# Allegro board PCAD - VIBRATION SENSOR.brd
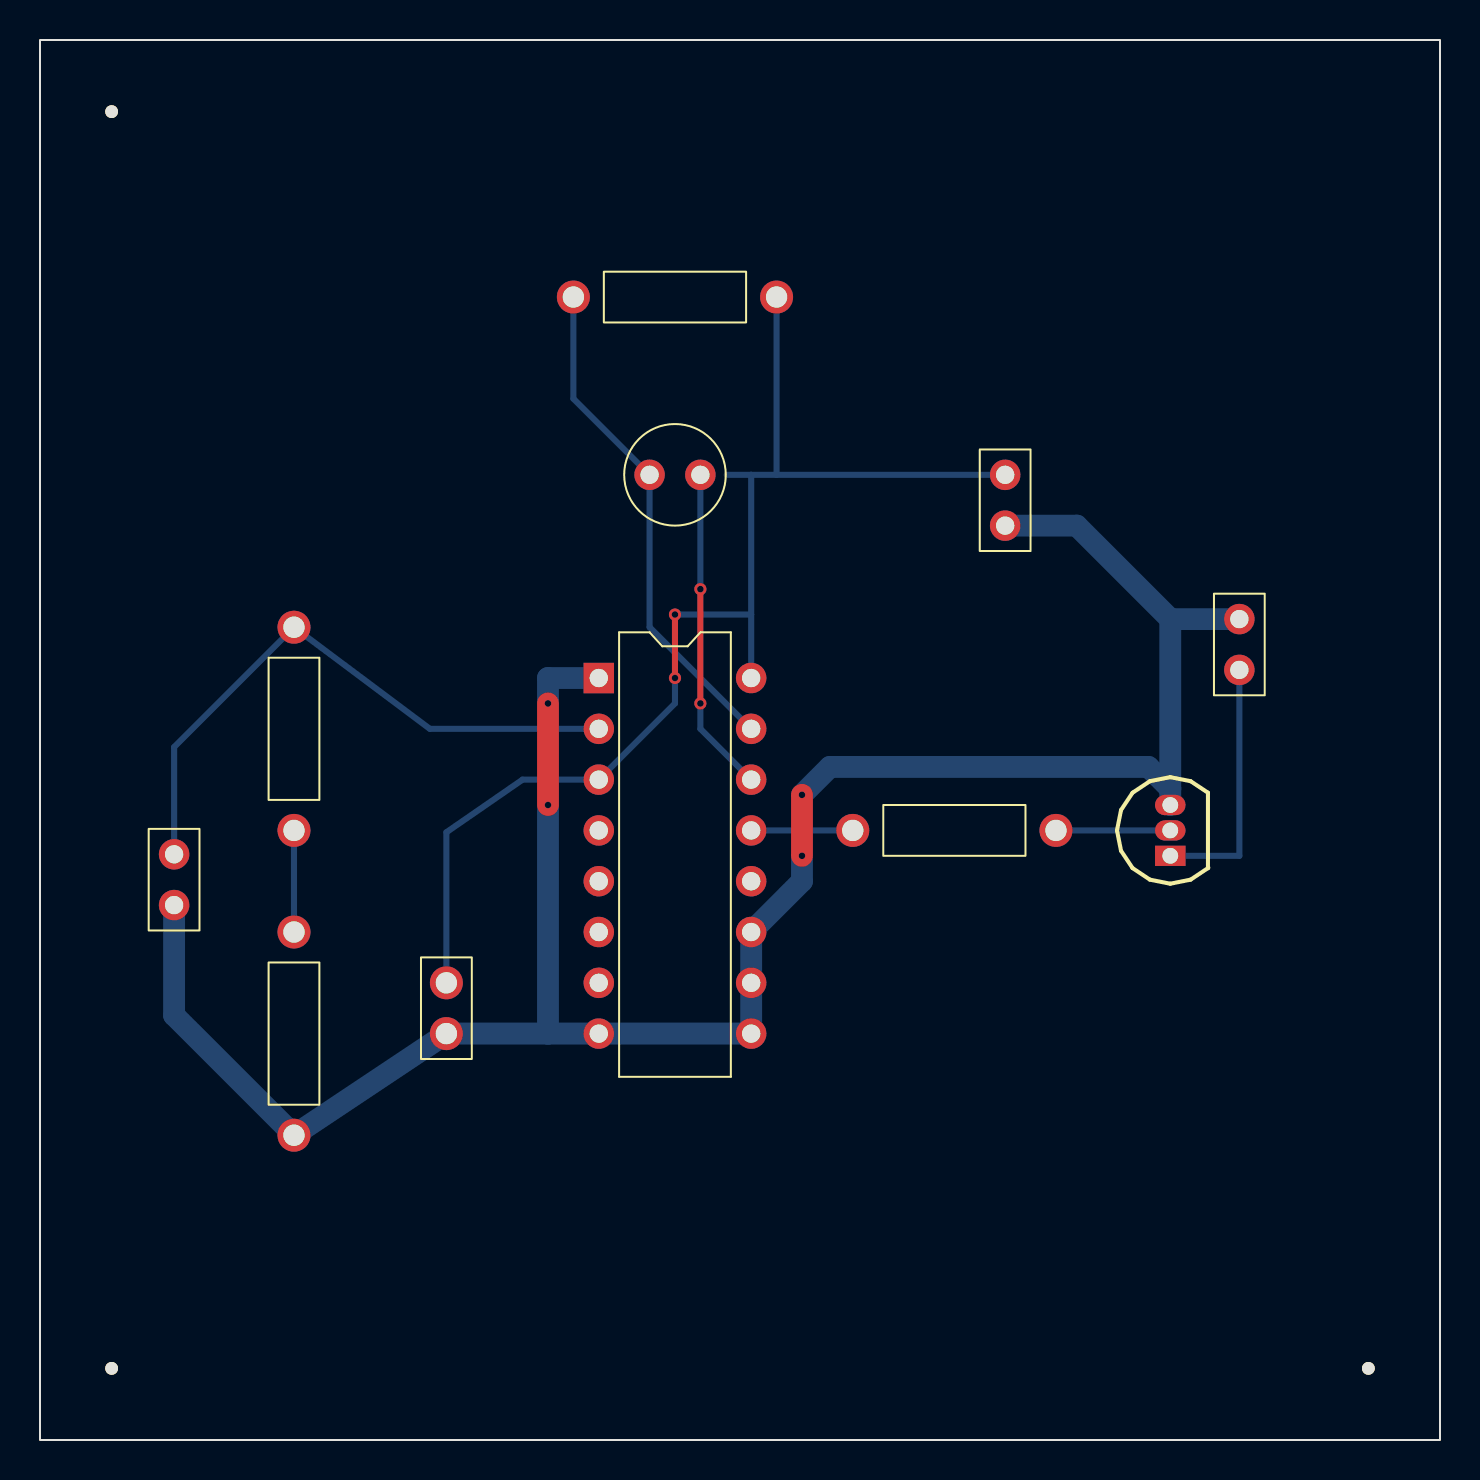
[diagram p0: board, top side]
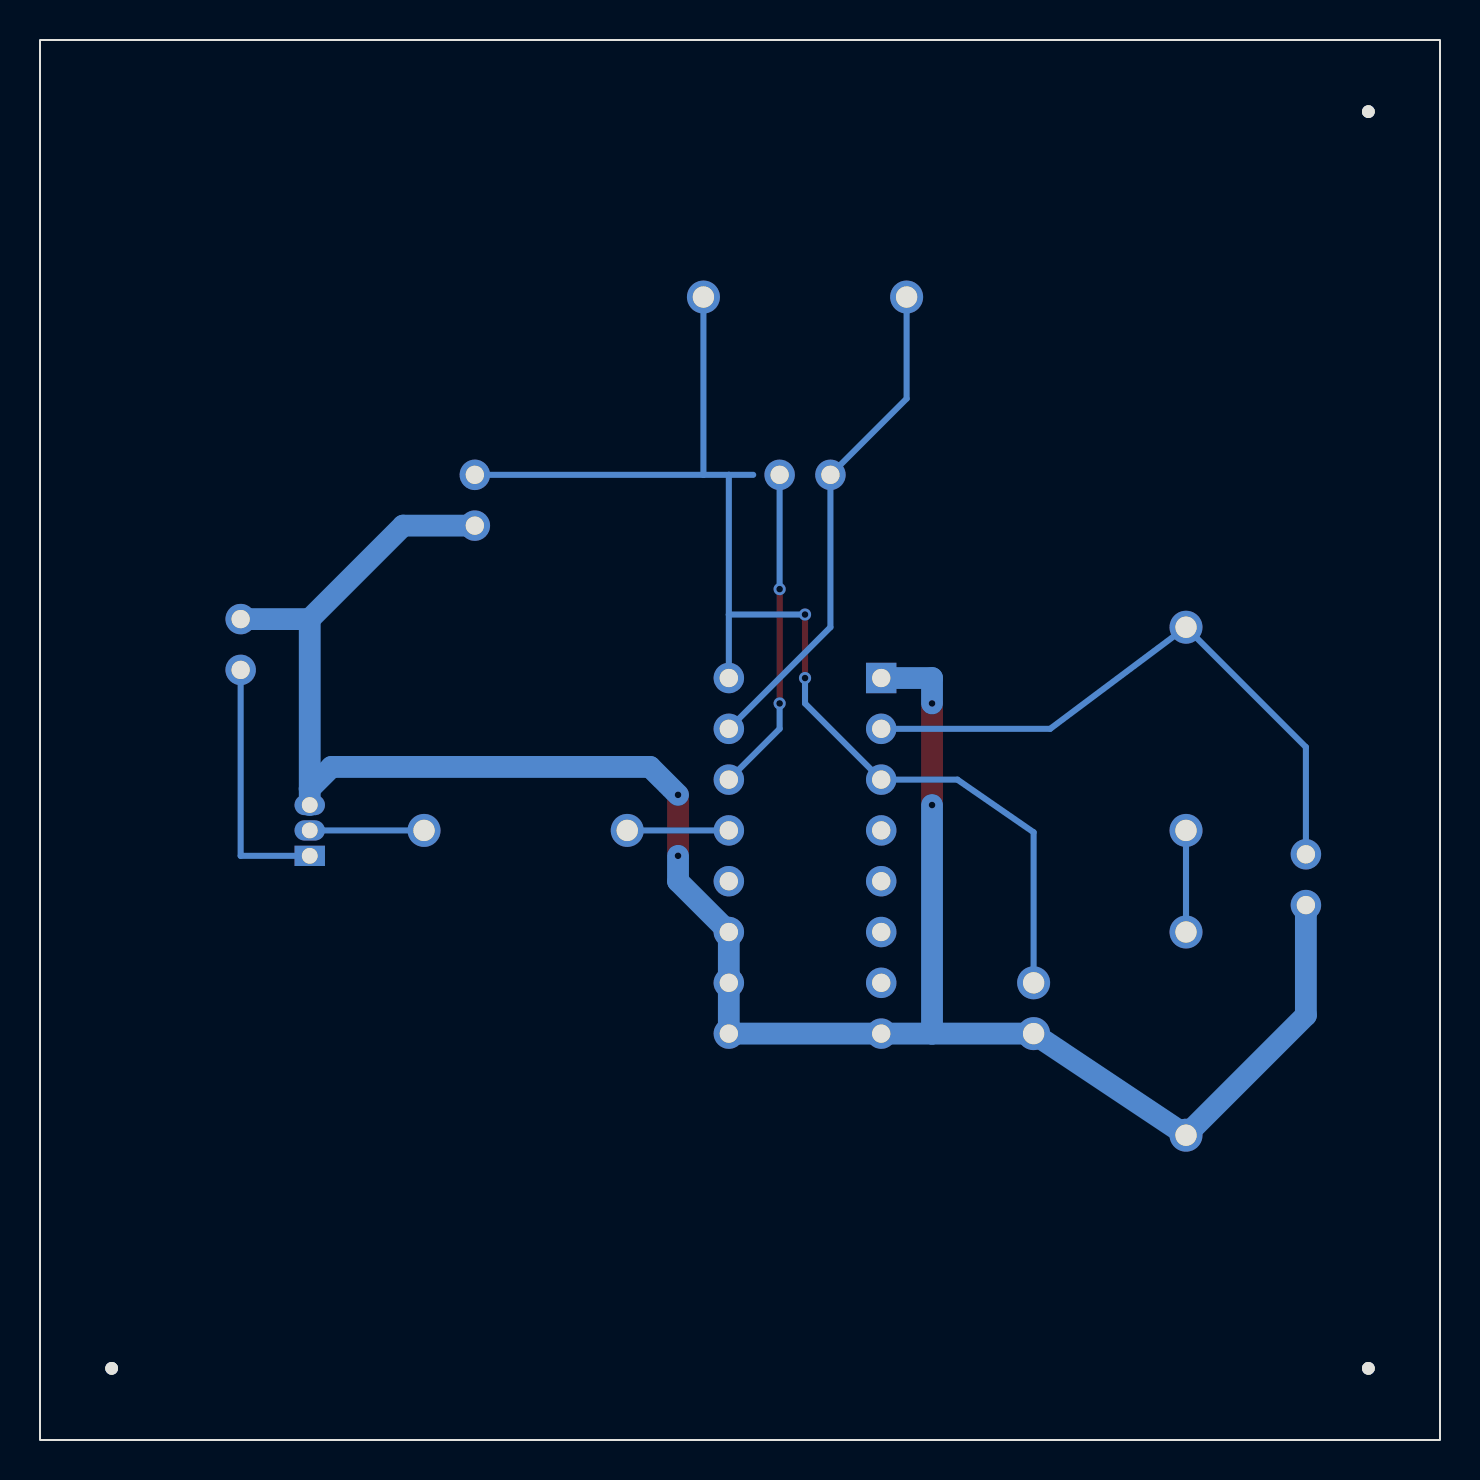
[diagram p1: board, bottom side, seen from below]

Outline 70 x 70 mm; copper layers: TOP, BOTTOM. Coordinates in mm from the lower left corner of the outline.
Outline path: rectangle 0,0 70,70

## Design rules (mm)
nets with their own width: min track width 0.305; nets N00883 N00907 N00948 N00985 N01522 N02229 N03021 N07454
nets with their own width: min track width 1.092; nets GND

## Placement (name value [footprint] x y rotation side)
BUTTON-CELL  3V  [JUMPER2]  48.26 48.26 270 top
C1  100nF  [CAPCK05]  20.32 22.86 180 top
C2  47uF/16V  [CAP196]  30.48 48.26 270 top
IC1  M74HC123  [DIP16_3]  27.94 38.1 0 top
J1  CON2  [JUMPER2]  59.97 38.51 90 top
NOREF  -  [unnamed]  66.42 3.58 0 top
NOREF#2  -  [#2]  70 0 90 top
NOREF#3  -  [unnamed]  3.58 3.58 0 top
NOREF#4  -  [unnamed]  3.58 66.42 0 top
NOREF#5  -  [#2]  0 70 0 top
PIEZO-SENSOR  PIEZO-TD_2  [JUMPER2]  6.71 29.29 270 top
R1  4M7  [RES400]  12.7 40.64 180 top
R2  4M7  [RES400]  12.7 25.4 180 top
R3  100k  [RES400]  26.67 57.15 270 top
R4  10k  [RES400]  40.64 30.48 270 top
T1  BC547  [TO92]  56.52 29.21 90 top

## Library data of the parts
BUTTON-CELL = BATTERY: User Part Number: ***
C1 = CAP NP: Tolerance: ***; User Part Number: ***
C2 = CAP POL: Tolerance: ***; User Part Number: ***
IC1 = M74HC123: Tolerance: ***; User Part Number: ***
J1 = CON2: User Part Number: ***
PIEZO-SENSOR = PIEZO TD_1: User Part Number: ***
R1-R4 = R: Tolerance: ***; User Part Number: ***
T1 = BC547_0

## Footprints (pads in the part's own frame, mm; a bottom-side part is the same pattern mirrored in y, then rotated)
CAP196
  round 1.524 hole 0.914: 1(0,0) 2(0,2.54)
CAPCK05
  round 1.651 hole 1.067: 1(0,0) 2(0,2.54)
DIP16_3
  rect 1.524x1.524 hole 0.914: 1(0,0)
  round 1.524 hole 0.914: 2(0,-2.54) 3(0,-5.08) 4(0,-7.62) 5(0,-10.16) 6(0,-12.7) 7(0,-15.24) 8(0,-17.78) 9(7.62,-17.78) 10(7.62,-15.24) 11(7.62,-12.7) 12(7.62,-10.16) 13(7.62,-7.62) 14(7.62,-5.08) 15(7.62,-2.54) 16(7.62,0)
JUMPER2
  round 1.524 hole 0.914: 1(0,0) 2(2.54,0)
RES400
  round 1.651 hole 1.067: 1(0,0) 2(0,10.16)
TO92
  rect 1.016x1.524 hole 0.787: 1(0,0)
  oval 1.016x1.524 hole 0.787: 2(1.27,0) 3(2.54,0)
unnamed
  round 0.635 hole 3.2 unplated: (0,0)

## Nets
GND: BUTTON-CELL.2(-) C1.2 IC1.1 IC1.8 IC1.9 IC1.10 IC1.11 J1.2 PIEZO-SENSOR.2(-) R2.2 T1.3(EMITTER)
N00883: BUTTON-CELL.1 C1.1 IC1.3 IC1.16 R3.2
N00907: C2.1 IC1.15 R3.1
N00948: IC1.2 PIEZO-SENSOR.1 R1.1
N00985: R1.2 R2.1
N01522: R4.2 T1.2
N02229: J1.1 T1.1
N03021: C2.2 IC1.14
N07454: IC1.13 R4.1

Pads without a net: IC1 4 5 6 7 12

## Via types
v1: diameter 0.61, hole 0.33, TOP to BOTTOM, 8 vias

## Routing (per net, layer and track width the routed paths; a pad name or vN(x,y) marks a point on that pad's centre or on a via; arc(x,y) is an arc through that point)
GND: length 114.1
  TOP w1.092: v1(25.4,36.83) v1(25.4,31.75) ; v1(38.1,32.26) v1(38.1,29.21)
  BOTTOM w1.092: 56.52,41.05 56.52,32.56 ; 56.52,41.05 51.84,45.72 BUTTON-CELL.2 ; 56.52,41.05 J1.2 ; 56.52,32.56 T1.3 ; 56.52,32.56 55.42,33.66 39.5,33.66 v1(38.1,32.26) ; IC1.1 25.4,38.1 v1(25.4,36.83) ; PIEZO-SENSOR.2 6.71,21.23 R2.2 C1.2 25.4,20.32 ; v1(25.4,31.75) 25.4,20.32 ; 25.4,20.32 IC1.8 IC1.9 IC1.10 IC1.11 38.1,27.94 v1(38.1,29.21)
N00883: length 62.6
  TOP w0.305: v1(31.75,38.1) v1(31.75,41.27)
  BOTTOM w0.305: v1(31.75,41.27) 35.56,41.27 ; 35.56,41.27 IC1.16 ; 35.56,41.27 35.56,48.26 ; 35.56,48.26 36.83,48.26 ; 35.56,48.26 34.34,48.26 ; 36.83,48.26 R3.2 ; 36.83,48.26 BUTTON-CELL.1 ; C1.1 20.32,30.39 24.13,33.02 IC1.3 31.75,36.83 v1(31.75,38.1)
N00907: length 25.3
  BOTTOM w0.305: R3.1 26.67,52.07 C2.1 30.48,40.64 IC1.15
N00948: length 30.8
  BOTTOM w0.305: PIEZO-SENSOR.1 6.71,34.65 R1.1 19.49,35.56 IC1.2
N00985: length 5.1
  BOTTOM w0.305: R1.2 R2.1
N01522: length 5.7
  BOTTOM w0.305: R4.2 T1.2
N02229: length 12.8
  BOTTOM w0.305: J1.1 59.97,29.21 T1.1
N03021: length 16.3
  TOP w0.305: v1(33.02,42.55) v1(33.02,36.83)
  BOTTOM w0.305: IC1.14 33.02,35.56 v1(33.02,36.83) ; C2.2 v1(33.02,42.55)
N07454: length 5.1
  BOTTOM w0.305: IC1.13 R4.1

## Text on the board
XSECTION_CHART: *  SURFACE - AIR 0 MIL(+0/-0) | L1 TOP CONDUCTOR - COPPER 1.2 MIL(+0/-0) | *  DIELECTRIC - FR-4 8 MIL(+0/-0) | L2 BOTTOM CONDUCTOR - COPPER 1.2 MIL(+0/-0) | DESIGN CROSS SECTION CHART | ___________________________ | TOTAL THICKNESS 10.4 MIL | 1-2
DIMENSION: FIGURE | FINISHED_SIZE | 13.0 | 31.0 | 36.0 | 42.0 | 126.0 | DRILL CHART: TOP to BOTTOM | ALL UNITS ARE IN MILS | PLATED | NON-PLATED | QTY | 8 | 3 | 24 | 10
